# Altium PCB PCB1.PcbDoc (part 1 of 2)
Units mil, origin at the board's own origin, x right, y up, seen from the top; angles counter-clockwise.
Board outline 2495 x 1003.43 mil, 4 copper layers (Top Layer, GND, 3.3V, Bottom Layer), stack 61.581 mil thick; 64 components, 69 nets, 245 pads, 37 vias.
Unrouted connection lines stored in the file: 4.
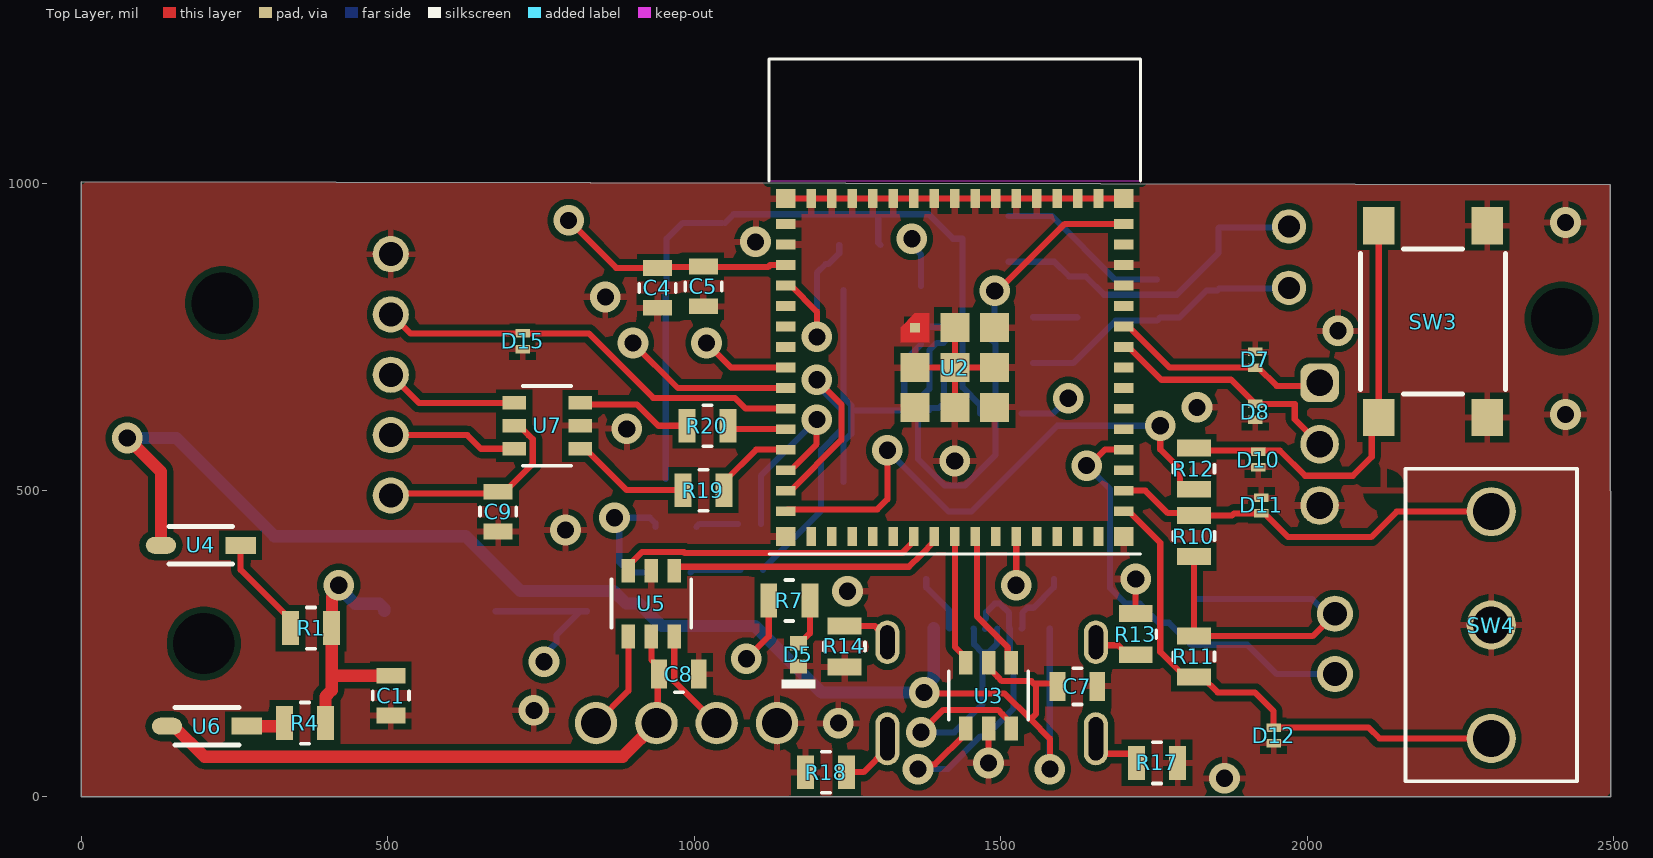
[diagram p0: Top Layer view]
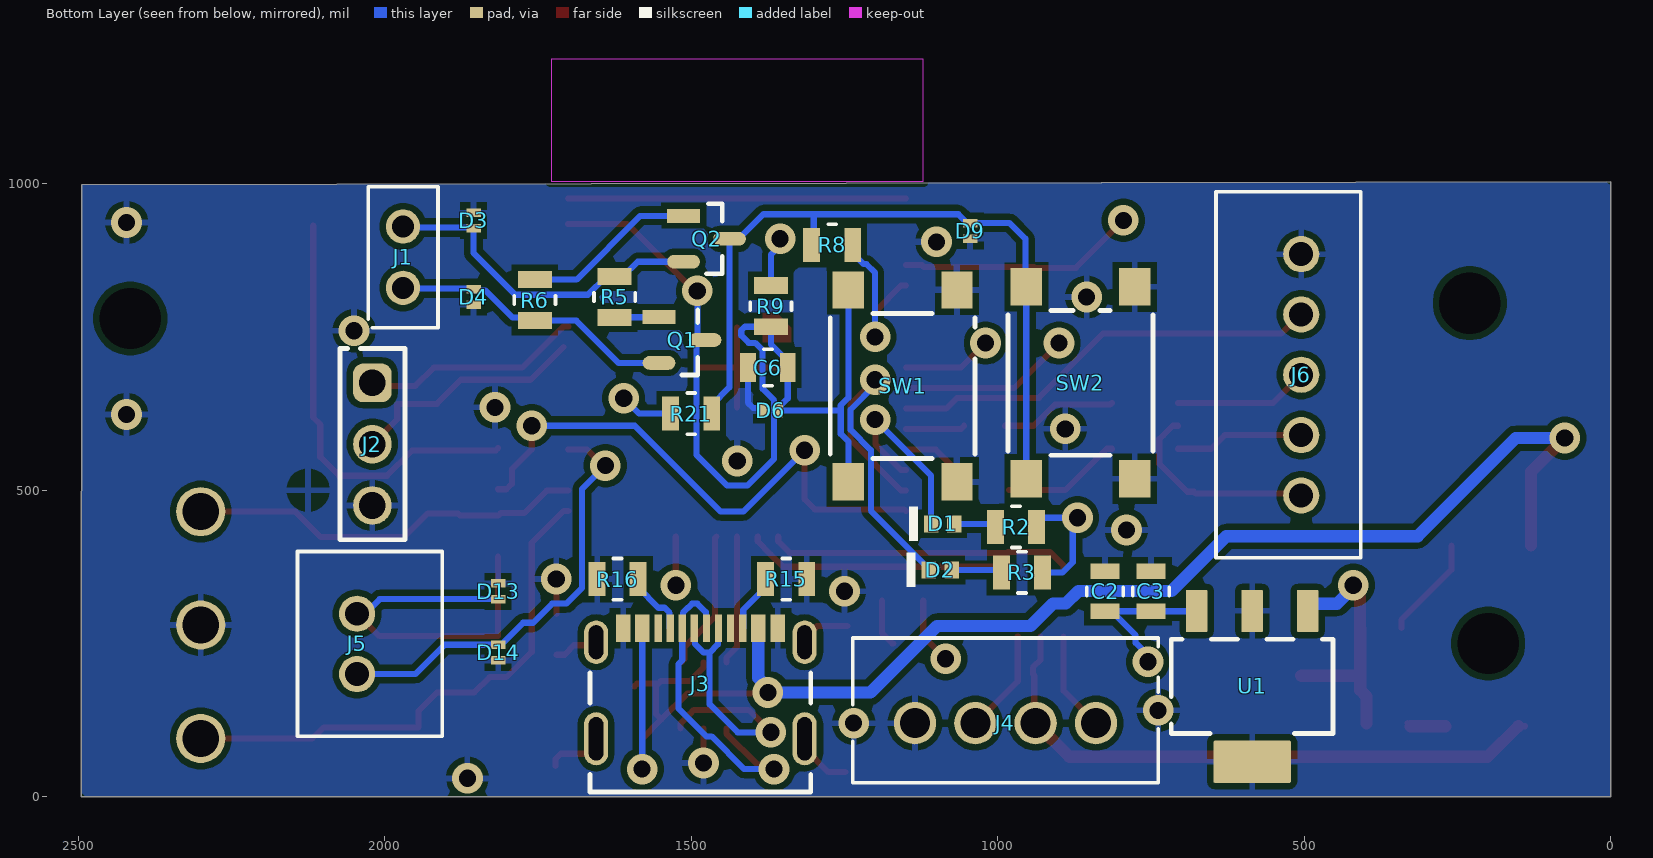
[diagram p1: Bottom Layer view, seen from below]
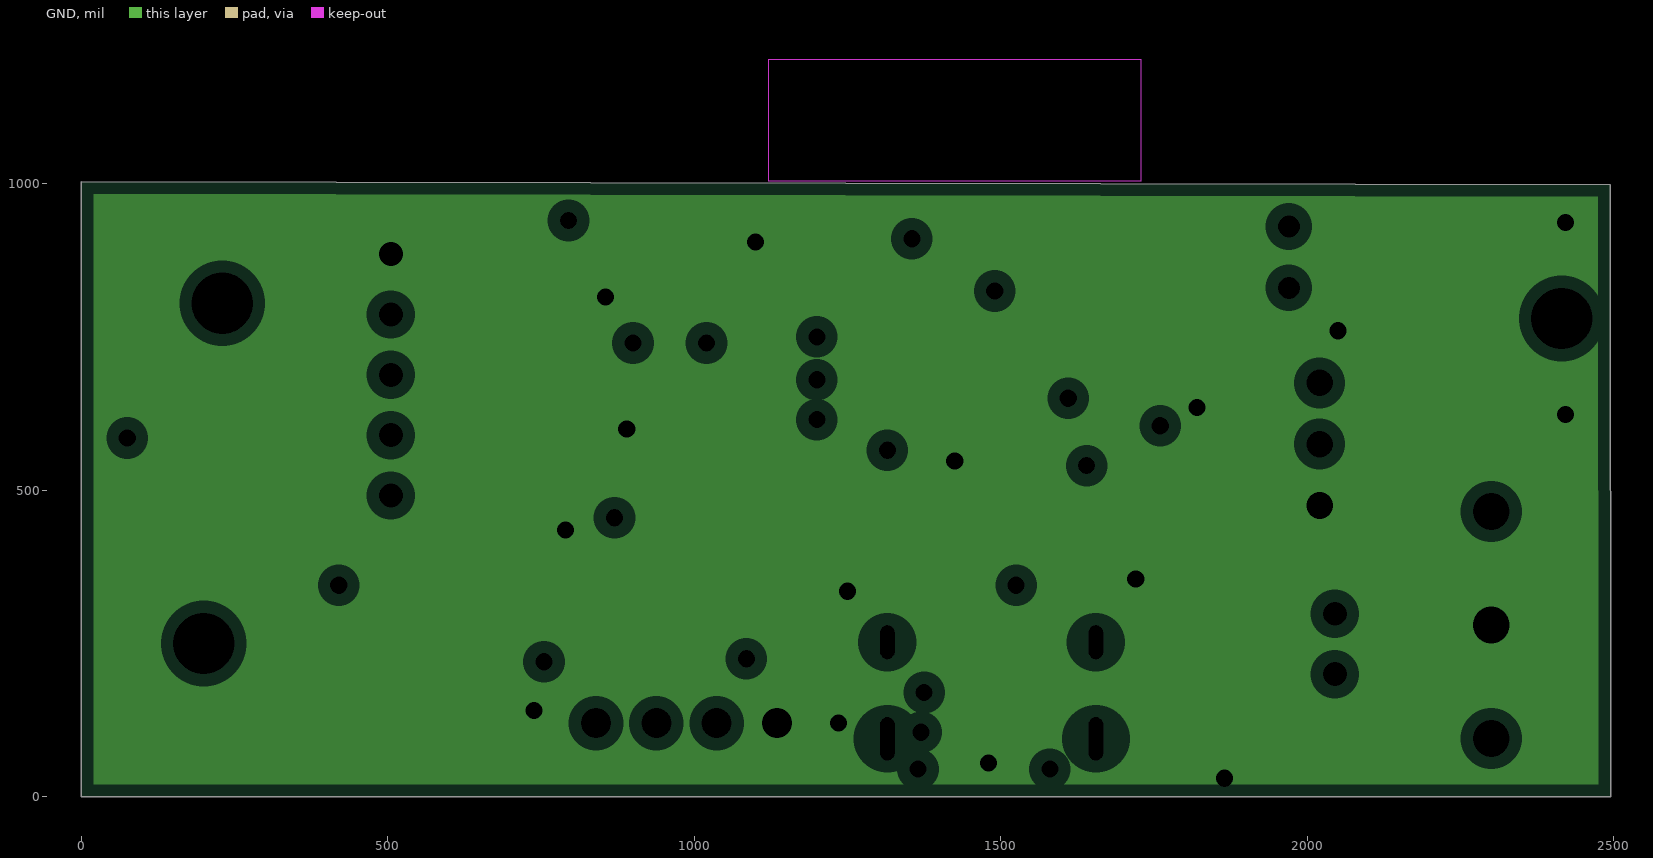
[diagram p2: GND, clearances drawn from the general rule]
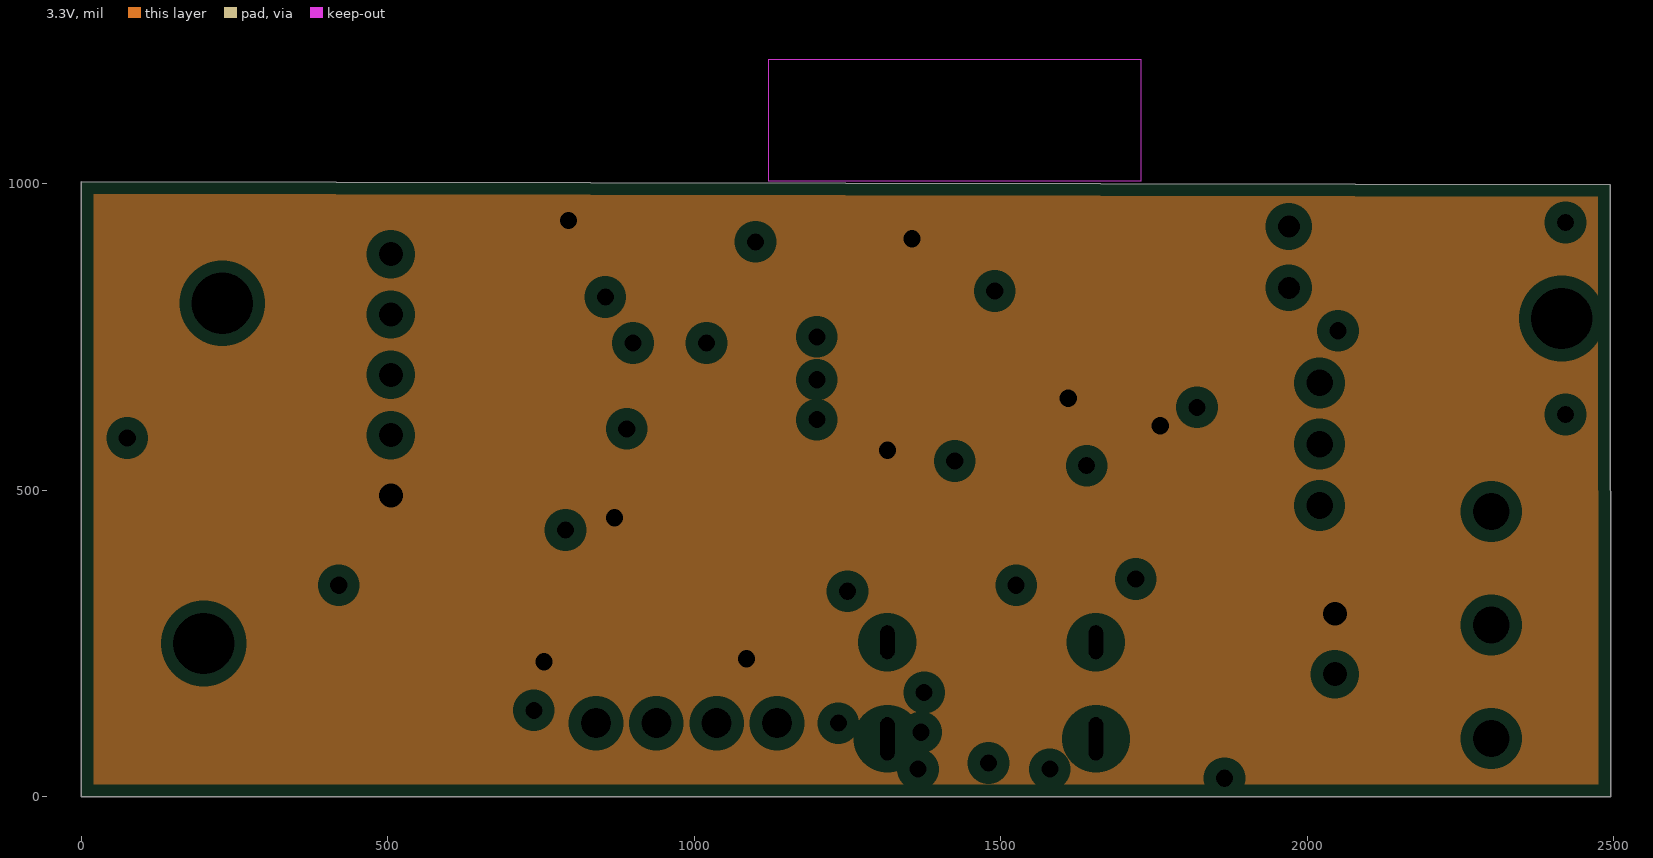
[diagram p3: 3.3V, clearances drawn from the general rule]
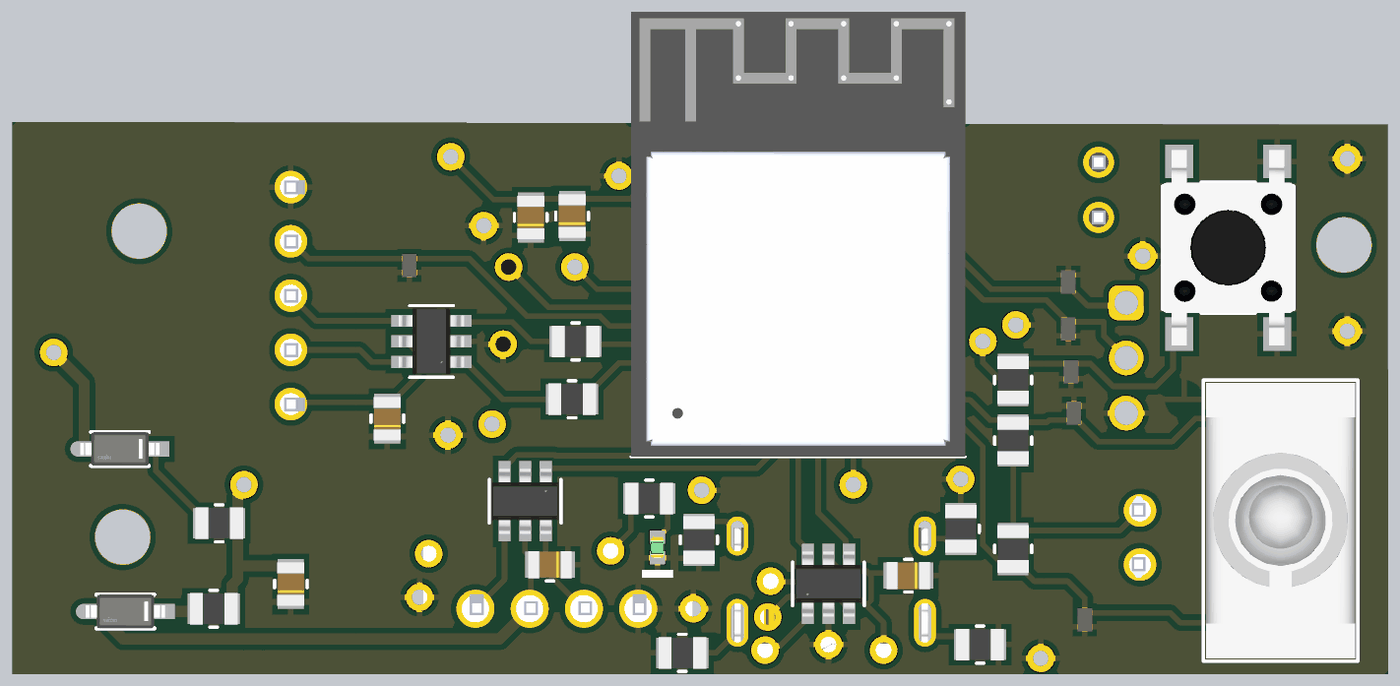
[diagram p4: 3D render of the assembled board from above, using the file's embedded part models]
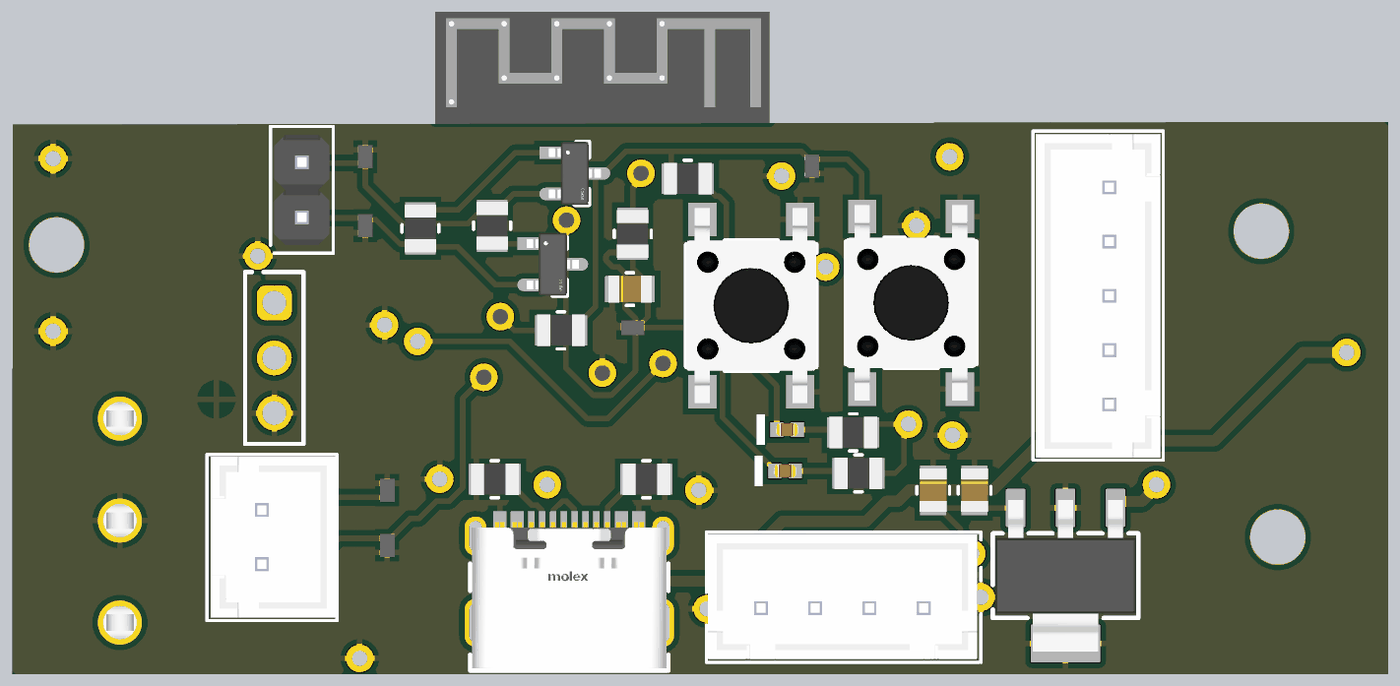
[diagram p5: 3D render of the assembled board from below, using the file's embedded part models]

## Layer stack, top to bottom
Top Solder: solder mask 0.4, Solder Resist, Dk 3.5
Top Layer: signal copper 1.378
Dielectric 2: prepreg 3.913, PP-006, Dk 4.1
GND: plane copper 0.598, net GND
Dielectric 1: dielectric 49.803, FR-4, Dk 4.8
3.3V: plane copper 0.598, net 3.3V
Dielectric 3: prepreg 3.913, PP-006, Dk 4.1
Bottom Layer: signal copper 1.378
Bottom Solder: solder mask 0.4, Solder Resist, Dk 3.5

## Board outline
0,0 0,1003.43 2494.51,998.13 2495,0

## Design rules (kind name [scope] priority, off if disabled: settings)
Clearance [All] p1: gap=10 ignorepadtopadclearanceinfootprint=FALSE except(6: Arc-Arc Arc-Track Arc-SMDPad Track-Track Track-SMDPad SMDPad-SMDPad)
PlaneClearance [All] p1: clearance=20
PlaneConnect [All] p1: planeconnectstyle=Relief reliefexpansion=20 reliefentries=4 reliefconductorwidth=10 reliefairgap=10
PolygonConnect [All] p1: connectstyle=Relief reliefconductorwidth=10 reliefentries=4 polygonreliefangle="90 Angle" airgapwidth=10
RoutingVias [All] p1: holewidth=12 width=24 viastyle="Through Hole" minholewidth=12 minwidth=24 maxholewidth=12 maxwidth=24
SolderMaskExpansion [All] p1: expansion=2 istentingtop=FALSE
SupplyNets "Schematic Supply Nets_2" [InNet('+5V_VBUS')] p1: voltage=0.000
SupplyNets "Schematic Supply Nets_1" [InNet('GND')] p2: voltage=0.000
Width [All] p1: maxlimit=100 minlimit=10 preferedwidth=10 minimp=50.000000 maximp=50.000000 favimp=50.000000
28 further rules are at their usual default settings.

## Components (designator, comment, footprint, x,y, rotation, side; value= is the part's Value field where it differs from the comment)
C1 "4.7 uF" CAP_CL21_SAM-L 505,165 r90 top value=4.7µF
C2 "10 uF" CAP_CL21_SAM-L 825,335 r270 bottom value=10µF
C3 "10 uF" CAP_CL21_SAM-L 750,335 r270 bottom value=10µF
C4 "10 uF" CAP_CL21_SAM-L 940,830 r90 top value=10µF
C5 ".1 uF" CAP_CL21_SAM-L 1015,832.48 r90 top value=100nF
C6 "1 uF" CAP_CL21_SAM-L 1375,700 r180 bottom value=1µF
C7 ".1 uF" CAP_CL21_SAM-L 1625,180 r180 top value=100nF
C8 ".1 uF" CAP_CL21_SAM-L 975,200 r180 top value=100nF
C9 ".1 uF" CAP_CL21_SAM-L 680,465 r90 top value=100nF
D1 "RED" LED0402R 1090,445 r180 bottom
D2 "RED" LED0402R 1093.7,370 r180 bottom
D3 "AQ3045-01ETG" SOD882 1855,940 r270 bottom
D4 "AQ3045-01ETG" SOD882 1855,815 r90 bottom
D5 "GREEN" LED0402G 1170,231.3 r90 top
D6 "AQ3045-01ETG" SOD882 1370,630 r180 bottom
D7 "AQ3045-01ETG" SOD882 1915,712.79 r270 top
D8 "AQ3045-01ETG" SOD882 1915,627.79 r90 top
D9 "AQ3045-01ETG" SOD882 1044.92,922.8 r90 bottom
D10 "AQ3045-01ETG" SOD882 1920,550 r90 top
D11 "AQ3045-01ETG" SOD882 1925,475 r270 top
D12 "AQ3045-01ETG" SOD882 1945,100 r90 top
D13 "AQ3045-01ETG" SOD882 1815,335 r270 bottom
D14 "AQ3045-01ETG" SOD882 1815,235 r90 bottom
D15 "AQ3045-01ETG" SOD882 720,742.8 r90 top
J1 "M20-9990246" CONN2_M20-999_1X2_HRW 1970,930 r90 bottom
J2 "61300311121" 61300311121 2020,575 r270 bottom
J3 "217179-0001" FP-2171790001-MFG 1485,139.76 r180 bottom
J4 "455-B4B-XH-A-ND" CONN_B4B-XH-A_JST 839.72,120 r180 bottom
J5 "B2B-XH-A" CONN_B2B-XH-A_JST 2045,200 r270 bottom
J6 "455-B5B-XH-A-ND" CONN_B5B-XH-A_JST 505,885 r90 bottom
Q1 "SS8050-G" FP-SS8050-G-IPC_B 1515,745 r180 bottom
Q2 "SS8050-G" FP-SS8050-G-IPC_B 1475,910 r180 bottom
R1 "0" RES_1220_SUS-L 375,275 r0 top value=0Ω
R2 "1K" RES_1220_SUS-L 970,440 r180 bottom value=1kΩ
R3 "1K" RES_1220_SUS-L 960.5,365.75 r180 bottom value=1kΩ
R4 "0" RES_1220_SUS-L 365,120 r0 top value=0Ω
R5 "10K" RES_1220_SUS-L 1625,815 r270 bottom value=10kΩ
R6 "10K" RES_1220_SUS-L 1755,810 r90 bottom value=10kΩ
R7 "1K" RES_1220_SUS-L 1155,320 r180 top value=1kΩ
R8 "0" RES_1220_SUS-L 1270,900 r180 bottom value=0Ω
R9 "10K" RES_1220_SUS-L 1370,800 r90 bottom value=10kΩ
R10 "10K" RES_1220_SUS-L 1815,425 r270 top value=10kΩ
R11 "10K" RES_1220_SUS-L 1815,228.5 r90 top value=10kΩ
R12 "27" RES_1220_SUS-L 1815,535 r270 top value=27Ω
R13 "1MR" RES_1220_SUS-L 1720,265 r90 top value=1MΩ
R14 "1MR" RES_1220_SUS-L 1245,245 r270 top value=1MΩ
R15 "5.1K" RES_1220_SUS-L 1345,355 r0 bottom value=5.1kΩ
R16 "5.1K" RES_1220_SUS-L 1620,355 r180 bottom value=5.1kΩ
R17 "1MR" RES_1220_SUS-L 1755,55 r0 top value=1MΩ
R18 "1MR" RES_1220_SUS-L 1215,40 r180 top value=1MΩ
R19 "0" RES_1220_SUS-L 1015,500 r180 top value=0Ω
R20 "0" RES_1220_SUS-L 1021.5,605 r180 top value=0Ω
R21 "10K" RES_1220_SUS-L 1500,625 r0 bottom value=10kΩ
SW1 "PTS645SH50SMTR92LFS" FP-PTS645SH50SMTR92LFS-MFG 1155,670 r90 bottom
SW2 "PTS645SH50SMTR92LFS" FP-PTS645SH50SMTR92LFS-MFG 865,675 r90 bottom
SW3 "PTS645SH50SMTR92LFS" FP-PTS645SH50SMTR92LFS-MFG 2205,775 r90 top
SW4 "100SP1T1B4M2QE" 100SP1T1_EWI 2300,94.96 r180 top
U1 "TL1963A-33DCYR" DCY0004A_N 585,180 r270 bottom
U2 "ESP32-S3-MINI-1-N8" XCVR_ESP32-S3-MINI-1-N8 1425,700 r0 top
U3 "USBLC6-2SC6" SOT23-6L_STM 1480,165 r90 top value=2.5pF
U4 "1N5819HW-7-F" FP-SOD123-IPC_B 195,410 r180 top value=50pF
U5 "USBLC6-2SC6" SOT23-6L_STM 930,315 r270 top value=2.5pF
U6 "1N5819HW-7-F" FP-SOD123-IPC_B 205,115 r180 top value=50pF
U7 "USBLC6-2SC6" SOT23-6L_STM 760,605 r180 top value=2.5pF

## Footprints (in the part's own frame and the unit in brackets; to place one, negate y for a bottom-side part, rotate by r counter-clockwise, add the part's x,y. Pads: shape width x height; smd on the part's side, far side on the other; paste and mask are expansions set on the pad)
100SP1T1_EWI [mil]
  round 80 hole 60 paste-99999 mask+0: 1(0,0) 2(0,-185.04) 3(0,-370.08)
  silkscreen extent -140,-440 140,70, body extent -135,-435 135,65, height 1168
61300311121 [mm] "Pin Header, pitch 2.54 mm, THT, Vertical, single row, 3p"
  rrect50% 1.6x1.6 hole 1.1: 1(-2.54,0)
  round 1.6 hole 1.1: 2(0,0) 3(2.54,0)
  silkscreen extent -3.96,-1.35 3.96,1.35
CAP_CL21_SAM-L [mm]
  rect 0.65x1.2 smd paste+0 mask+0: 1(-0.825,0) 2(0.825,0)
  silkscreen extent -0.17,-0.75 0.17,0.75, body extent -1,-0.63 1,0.63, height 1.35
CONN2_M20-999_1X2_HRW [mil]
  round 56 / inner round 60 / far side round 56 hole 36 paste-99999 mask+0: 1(0,0) 2(-100,0)
  silkscreen extent -165,-57 65,57, body extent -150,-50 50,50, height 223
CONN_B2B-XH-A_JST [mil]
  round 59 hole 39 paste-99999 mask+0: 1(0,0) 2(-98.43,0)
  silkscreen extent -200,-97 101,139, body extent -196,-90 96,136, height 276
CONN_B4B-XH-A_JST [mil]
  round 69 hole 49 paste-99999 mask+0: 1(0,0) 2(-98.43,0) 3(-196.85,0) 4(-295.28,0)
  silkscreen extent -397,-97 101,139, body extent -394,-91 94,135, height 276
CONN_B5B-XH-A_JST [mil]
  round 59 hole 39 paste-99999 mask+0: 1(0,0) 2(-98.43,0) 3(-196.85,0) 4(-295.28,0) 5(-393.7,0)
  silkscreen extent -495,-97 102,139, body extent -491,-92 96,134, height 276
DCY0004A_N [mm] "SOT223, 4-Leads, Body 6.7x3.7mm, Pitch 2.3mm, IPC Medium Density"
  rrect11% 1.75x0.9 smd: 1(-3.125,2.3) 2(-3.125,0) 3(-3.125,-2.3)
  rrect6% 1.75x3.2 smd: 4(3.125,0)
  silkscreen extent -1.95,-3.35 1.95,3.35, body extent -3.5,-3.25 3.5,3.25, height 1.62
FP-2171790001-MFG [mm]
  rect 0.6x1.15 smd paste+0 mask+0: A1B12(-3.2,3.425) A4B9(-2.4,3.425) B1A12(3.2,3.425) B4A9(2.4,3.425)
  rect 0.3x1.15 smd paste+0 mask+0: A5(-1.25,3.425) A6(-0.25,3.425) A7(0.25,3.425) A8(1.25,3.425) B5(1.75,3.425) B6(0.75,3.425) B7(-0.75,3.425) B8(-1.75,3.425)
  rrect100% 1x1.8 hole 1.4 slot 0.6 at 0 deg paste-2539.97 mask+0: S1(-4.32,2.85) S2(4.32,2.85)
  rrect100% 1x2.2 hole 1.8 slot 0.6 at 0 deg paste-2539.97 mask+0: S3(-4.32,-1.15) S4(4.32,-1.15)
  silkscreen extent -4.57,-3.35 4.57,1.58, body extent -4.47,-3.25 4.47,3.5, height 3.36
FP-PTS645SH50SMTR92LFS-MFG [mm]
  rect 1.55x1.3 smd paste+0 mask+0: 1(-3.975,2.25) 2(3.975,2.25) 3(-3.975,-2.25) 4(3.975,-2.25)
  silkscreen extent -3,-3 3,3, body extent -4.5,-3 4.5,3, height 4.3
FP-SOD123-IPC_B [mil]
  rect 49.51x27.66 smd paste+0 mask+0: 1(-64.98,0)
  rrect100% 49.51x27.66 smd paste+0 mask+0: 2(64.98,0)
  silkscreen extent -52,-31 52,31, body extent -100,-40 100,40, height 10
FP-SS8050-G-IPC_B [mm]
  rect 1.357x0.572 smd paste+0 mask+0: 1(-0.951,0.95)
  rrect100% 1.357x0.572 smd paste+0 mask+0: 2(-0.951,-0.95) 3(0.951,0)
  silkscreen extent 0,-1.45 0.65,1.25, body extent -1.21,-1.45 1.21,1.45, height 1.15
LED0402G [mm]
  rect 0.6x0.7 smd: 1(-0.475,0) 2(0.475,0)
  silkscreen extent -1.4,-0.71 -1.03,0.71, body extent -0.5,-0.3 0.5,0.3, height 0.21
LED0402R [mm]
  rect 0.6x0.7 smd: 1(-0.475,0) 2(0.475,0)
  silkscreen extent -1.4,-0.71 -1.03,0.71, body extent -0.5,-0.3 0.5,0.3, height 0.21
RES_1220_SUS-L [mil]
  rect 27.62x55.09 smd paste+0 mask+0: 1(-33.5,0) 2(33.5,0)
  silkscreen extent -7,-34 7,34, body extent -43,-29 43,29, height 28
SOD882 [mm]
  rect 0.35x0.6 smd: 1(-0.325,0) 2(0.325,0)
  body extent -0.54,-0.34 0.54,0.34, height 0.44
SOT23-6L_STM [mil]
  rect 38.5x22 smd paste+0 mask+0: 1(-53.75,37.4) 2(-53.75,0) 3(-53.75,-37.4) 4(53.75,-37.4) 5(53.75,0) 6(53.75,37.4)
  silkscreen extent -40,-65 40,65, body extent -59,-60 59,60, height 57
XCVR_ESP32-S3-MINI-1-N8 [mm]
  rect 0.8x0.4 smd: 1(-7,5.95) 2(-7,5.1) 3(-7,4.25) 4(-7,3.4) 5(-7,2.55) 6(-7,1.7) 7(-7,0.85) 8(-7,0) 9(-7,-0.85) 10(-7,-1.7) 11(-7,-2.55) 12(-7,-3.4) 13(-7,-4.25) 14(-7,-5.1) 15(-7,-5.95) 31(7,-5.95) 32(7,-5.1) 33(7,-4.25) 34(7,-3.4) 35(7,-2.55) 36(7,-1.7) 37(7,-0.85) 38(7,0) 39(7,0.85) 40(7,1.7) 41(7,2.55) 42(7,3.4) 43(7,4.25) 44(7,5.1) 45(7,5.95)
  rect 0.4x0.8 smd: 16(-5.95,-7) 17(-5.1,-7) 18(-4.25,-7) 19(-3.4,-7) 20(-2.55,-7) 21(-1.7,-7) 22(-0.85,-7) 23(0,-7) 24(0.85,-7) 25(1.7,-7) 26(2.55,-7) 27(3.4,-7) 28(4.25,-7) 29(5.1,-7) 30(5.95,-7) 46(5.95,7) 47(5.1,7) 48(4.25,7) 49(3.4,7) 50(2.55,7) 51(1.7,7) 52(0.85,7) 53(0,7) 54(-0.85,7) 55(-1.7,7) 56(-2.55,7) 57(-3.4,7) 58(-4.25,7) 59(-5.1,7) 60(-5.95,7)
  rect 1.2x1.2 smd: 61(0,0) 67(0,1.65) 68(1.65,1.65) 69(-1.65,0) 70(1.65,0) 71(-1.65,-1.65) 72(0,-1.65) 73(1.65,-1.65)
  rect 0.8x0.8 smd: 62(-7,7) 63(-7,-7) 64(7,-7) 65(7,7)
  rect 0.4x0.4 smd paste-1 mask+0: 66(-1.65,1.65)
  Top Layer region: -1.05,1.05 -2.25,1.05 -2.25,1.65 -1.65,2.25 -1.05,2.25
  Keep-Out Layer region: 7.7,7.725 -7.7,7.725 -7.7,12.775 7.7,12.775
  Keep-Out Layer region: 7.7,7.725 -7.7,7.725 -7.7,12.775 7.7,12.775
  silkscreen extent -7.7,-7.73 7.7,12.78, body extent -7.7,-7.73 7.7,12.78, height 2.55

## Part data
C1: library part CL21A475KAQNNNE, "25V 4.7uF X5R ±10% 0805 Multilayer Ceramic Capacitors MLCC - SMD/SMT ROHS", Case Code (Imperial)=0805, Case Code (Metric)=2012, Dielectric=X5R, Dielectric Material=Ceramic, Manufacturer="Samsung Electro-Mechanics", Max Operating Temperature=85°C, Min Operating Temperature=-55°C, Supplier Part Number=1276-1244-6-ND, Tolerance=10%, Voltage Rating=25V, Case/Package=0805, Category="Ceramic Capacitors", China RoHS=Compliant, ComponentLink1Description=https://datasheet.octopart.com:443/CL21A475KAQNNNE-Samsung-Electro-Mechanics-datasheet-136322593.pdf?src-supplier=IHS, ComponentLink1URL=https://datasheet.octopart.com:443/CL21A475KAQNNNE-Samsung-Electro-Mechanics-datasheet-136322593.pdf?src-supplier=IHS, ComponentLink2Description=https://datasheet.octopart.com:443/CL21A475KAQNNNE-Samsung-Electro-Mechanics-datasheet-11797909.pdf?src-supplier=Future+Electronics, ComponentLink2URL=https://datasheet.octopart.com:443/CL21A475KAQNNNE-Samsung-Electro-Mechanics-datasheet-11797909.pdf?src-supplier=Future+Electronics, ComponentLink3Description=https://datasheet.octopart.com:443/CL21A475KAQNNNE-Samsung-Electro-Mechanics-datasheet-110333979.pdf?src-supplier=Future+Electronics, ComponentLink3URL=https://datasheet.octopart.com:443/CL21A475KAQNNNE-Samsung-Electro-Mechanics-datasheet-110333979.pdf?src-supplier=Future+Electronics, ComponentLink4Description=https://datasheet.octopart.com:443/CL21A475KAQNNNE-Samsung-Electro-Mechanics-datasheet-81462145.pdf?src-supplier=Future+Electronics, ComponentLink4URL=https://datasheet.octopart.com:443/CL21A475KAQNNNE-Samsung-Electro-Mechanics-datasheet-81462145.pdf?src-supplier=Future+Electronics, ComponentLink5Description=https://datasheet.octopart.com:443/CL21A475KAQNNNE-Samsung-datasheet-48647566.pdf?src-supplier=Future+Electronics, ComponentLink5URL=https://datasheet.octopart.com:443/CL21A475KAQNNNE-Samsung-datasheet-48647566.pdf?src-supplier=Future+Electronics, ComponentLink6Description=https://datasheet.octopart.com:443/CL21A475KAQNNNE-Samsung-datasheet-42485236.pdf?src-supplier=Future+Electronics, ComponentLink6URL=https://datasheet.octopart.com:443/CL21A475KAQNNNE-Samsung-datasheet-42485236.pdf?src-supplier=Future+Electronics, ComponentLink7Description=https://datasheet.octopart.com:443/CL21A475KAQNNNE-Samsung-Electro-Mechanics-datasheet-149154248.pdf?src-supplier=Future+Electronics, ComponentLink7URL=https://datasheet.octopart.com:443/CL21A475KAQNNNE-Samsung-Electro-Mechanics-datasheet-149154248.pdf?src-supplier=Future+Electronics, ComponentLink8Description=https://datasheet.octopart.com/CL21A475KAQNNNE-Samsung-Electro-Mechanics-datasheet-97040617.pdf, ComponentLink8URL=https://datasheet.octopart.com/CL21A475KAQNNNE-Samsung-Electro-Mechanics-datasheet-97040617.pdf, ComponentLink9Description=https://datasheet.octopart.com/CL21A475KAQNNNE-Samsung-Electro-Mechanics-datasheet-8324245.pdf, ComponentLink9URL=https://datasheet.octopart.com/CL21A475KAQNNNE-Samsung-Electro-Mechanics-datasheet-8324245.pdf, ComponentLink10Description=https://datasheet.octopart.com/General-Multilayer-Ceramic-Capacitors-Samsung-datasheet-family-111.pdf, ComponentLink10URL=https://datasheet.octopart.com/General-Multilayer-Ceramic-Capacitors-Samsung-datasheet-family-111.pdf, ComponentLink11Description=https://datasheet.octopart.com:443/CL21A475KAQNNNE-Samsung-datasheet-59220082.pdf?src-supplier=TME, ComponentLink11URL=https://datasheet.octopart.com:443/CL21A475KAQNNNE-Samsung-datasheet-59220082.pdf?src-supplier=TME, ComponentLink12Description=http://sigma.octopart.com:80/rohs_certificate/General-Multilayer-Ceramic-Capacitors-Samsung-family-110.pdf?src-supplier=Compliance+Statements, ComponentLink12URL=http://sigma.octopart.com:80/rohs_certificate/General-Multilayer-Ceramic-Capacitors-Samsung-family-110.pdf?src-supplier=Compliance+Statements, ComponentLink13Description=http://sigma.octopart.com:80/rohs_statement/General-Multilayer-Ceramic-Capacitors-Samsung-family-132.pdf?src-supplier=Compliance+Statements, ComponentLink13URL=http://sigma.octopart.com:80/rohs_statement/General-Multilayer-Ceramic-Capacitors-Samsung-family-132.pdf?src-supplier=Compliance+Statements, ComponentLink14Description=http://sigma.octopart.com:80/reach_statement/General-Multilayer-Ceramic-Capacitors-Samsung-family-133.pdf?src-supplier=Compliance+Statements, ComponentLink14URL=http://sigma.octopart.com:80/reach_statement/General-Multilayer-Ceramic-Capacitors-Samsung-family-133.pdf?src-supplier=Compliance+Statements, Country of Origin="Mainland China, Philippines, South Korea", Depth=1.25mm, Export Control Classification Number (ECCN) Code=EAR99, Harmonized Tariff Schedule (HTS) Code=8532.24.00.20, Height=1.4mm, Introduction Date=2009-10-29, Lead Free="Lead Free", Length=2mm, Lifecycle Status=Production, Manufacturer Part Number=CL21A475KAQNNNE, Material=Ceramic, Mounting Technology="Surface Mount", Number of Terminals=2, Packaging="Tape & Reel", Pricing="1=0.1, 10=0.057, 50=0.039, 100=0.0337, 500=0.02474, 1000=0.02199 (USD)", Radiation Hardening=No, REACH SVHC=Yes, RoHS=Compliant, Schedule B="8532240020, 8532240020|8532240020|8532240020|8532240020|8532240020|8532240020|8532240020|8532240020|8532240020|8532240020|8532240020|8532240020|8532240020, 8532240020|8532240020|8532240020|8532240020|8532240020|8532240020|8532240020|8532240020|8532240020|8532240020|8532240020|8532240020|8532240020|8532240020, 8532240020|8532240020|8532240020|8532240020|8532240020|8532240020|8532240020|8532240020|8532240020|8532240020|8532240020|8532240020|8532240020|8532240020|8532240020", Stock=1914384, Supplier=DigiKey, Thickness=1.397mm, Voltage Rating (DC)=25V, Width=1.25mm
C2 C3 C4: library part CL21B106KOQNNNE, "16V 10uF X7R ±10% 0805 Multilayer Ceramic Capacitors MLCC - SMD/SMT ROHS", Case Code (Imperial)=0805, Case Code (Metric)=2012, Dielectric=X7R, Dielectric Material=Ceramic, Manufacturer="Samsung Electro-Mechanics", Max Operating Temperature=125°C, Min Operating Temperature=-55°C, Supplier Part Number=1276-2872-6-ND, Tolerance=10%, Voltage=16V, Case/Package=0805, Category="Ceramic Capacitors", China RoHS=Compliant, ComponentLink1Description=https://datasheet.octopart.com:443/CL21B106KOQNNNE-Samsung-Electro-Mechanics-datasheet-136482503.pdf?src-supplier=IHS, ComponentLink1URL=https://datasheet.octopart.com:443/CL21B106KOQNNNE-Samsung-Electro-Mechanics-datasheet-136482503.pdf?src-supplier=IHS, ComponentLink2Description=https://datasheet.octopart.com:443/CL21B106KOQNNNE-Samsung-Electro-Mechanics-datasheet-116891046.pdf?src-supplier=Future+Electronics, ComponentLink2URL=https://datasheet.octopart.com:443/CL21B106KOQNNNE-Samsung-Electro-Mechanics-datasheet-116891046.pdf?src-supplier=Future+Electronics, ComponentLink3Description=https://datasheet.octopart.com:443/CL21B106KOQNNNE-Samsung-Electro-Mechanics-datasheet-81462191.pdf?src-supplier=Future+Electronics, ComponentLink3URL=https://datasheet.octopart.com:443/CL21B106KOQNNNE-Samsung-Electro-Mechanics-datasheet-81462191.pdf?src-supplier=Future+Electronics, ComponentLink4Description=https://datasheet.octopart.com:443/CL21B106KOQNNNE-Samsung-datasheet-12530662.pdf?src-supplier=Future+Electronics, ComponentLink4URL=https://datasheet.octopart.com:443/CL21B106KOQNNNE-Samsung-datasheet-12530662.pdf?src-supplier=Future+Electronics, ComponentLink5Description=https://datasheet.octopart.com:443/CL21B106KOQNNNE-Samsung-datasheet-26669285.pdf?src-supplier=Future+Electronics, ComponentLink5URL=https://datasheet.octopart.com:443/CL21B106KOQNNNE-Samsung-datasheet-26669285.pdf?src-supplier=Future+Electronics, ComponentLink6Description=https://datasheet.octopart.com:443/CL21B106KOQNNNE-Samsung-Electro-Mechanics-datasheet-149045986.pdf?src-supplier=Future+Electronics, ComponentLink6URL=https://datasheet.octopart.com:443/CL21B106KOQNNNE-Samsung-Electro-Mechanics-datasheet-149045986.pdf?src-supplier=Future+Electronics, ComponentLink7Description=https://datasheet.octopart.com/CL21B106KOQNNNE-Samsung-Electro-Mechanics-datasheet-97040617.pdf, ComponentLink7URL=https://datasheet.octopart.com/CL21B106KOQNNNE-Samsung-Electro-Mechanics-datasheet-97040617.pdf, ComponentLink8Description=https://datasheet.octopart.com/CL21B106KOQNNNE-Samsung-Electro-Mechanics-datasheet-8324245.pdf, ComponentLink8URL=https://datasheet.octopart.com/CL21B106KOQNNNE-Samsung-Electro-Mechanics-datasheet-8324245.pdf, ComponentLink9Description=https://datasheet.octopart.com:443/CL21B106KOQNNNE-Samsung-Electro-Mechanics-datasheet-11806859.pdf?src-supplier=Arrow+Electronics, ComponentLink9URL=https://datasheet.octopart.com:443/CL21B106KOQNNNE-Samsung-Electro-Mechanics-datasheet-11806859.pdf?src-supplier=Arrow+Electronics, ComponentLink10Description=https://datasheet.octopart.com:443/CL21B106KOQNNNE-Samsung-datasheet-8326407.pdf?src-supplier=TME, ComponentLink10URL=https://datasheet.octopart.com:443/CL21B106KOQNNNE-Samsung-datasheet-8326407.pdf?src-supplier=TME, Contact Plating=Tin, Country of Origin="Mainland China, Philippines, South Korea", Depth=1.25mm, Export Control Classification Number (ECCN) Code=EAR99, Harmonized Tariff Schedule (HTS) Code=8532.24.00.20, Height=1.4mm, Introduction Date=2010-04-09, Length=2mm, Lifecycle Status=Production, Manufacturer Part Number=CL21B106KOQNNNE, Material=Ceramic, Mounting Technology="Surface Mount", Number of Terminals=2, Pricing="1=0.08, 10=0.035 (USD)", Radiation Hardening=No, REACH SVHC=Yes, RoHS=Compliant, Schedule B="8532240020, 8532240020|8532240020, 8532240020|8532240020|8532240020, 8532240020|8532240020|8532240020|8532240020", Stock=2199280, Supplier=DigiKey, Thickness=1.397mm, Voltage Rating=16V, Voltage Rating (DC)=16V, Width=1.25mm
C5 C7 C8 C9: library part CL21B104KBCNNNC, "50V 100nF X7R ±10% 0805 Multilayer Ceramic Capacitors MLCC - SMD/SMT ROHS", Case Code (Imperial)=0805, Case Code (Metric)=2012, Dielectric=X7R, Dielectric Material=Ceramic, Manufacturer="Samsung Electro-Mechanics", Max Operating Temperature=125°C, Min Operating Temperature=-55°C, Supplier Part Number=1276-1003-6-ND, Tolerance=10%, Voltage=50V, Case/Package=0805, Category="Ceramic Capacitors", China RoHS=Compliant, ComponentLink1Description=https://datasheet.octopart.com:443/CL21B104KBCNNNC-Samsung-Electro-Mechanics-datasheet-137745078.pdf?src-supplier=IHS, ComponentLink1URL=https://datasheet.octopart.com:443/CL21B104KBCNNNC-Samsung-Electro-Mechanics-datasheet-137745078.pdf?src-supplier=IHS, ComponentLink2Description=https://datasheet.octopart.com/CL21B104KBCNNNC-Samsung-Electro-Mechanics-datasheet-8324245.pdf, ComponentLink2URL=https://datasheet.octopart.com/CL21B104KBCNNNC-Samsung-Electro-Mechanics-datasheet-8324245.pdf, ComponentLink3Description=https://datasheet.octopart.com/CL21B104KBCNNNC-Samsung-Electro-Mechanics-datasheet-97040617.pdf, ComponentLink3URL=https://datasheet.octopart.com/CL21B104KBCNNNC-Samsung-Electro-Mechanics-datasheet-97040617.pdf, ComponentLink4Description=https://datasheet.octopart.com:443/CL21B104KBCNNNC-Samsung-Electro-Mechanics-datasheet-11548950.pdf?src-supplier=Future+Electronics, ComponentLink4URL=https://datasheet.octopart.com:443/CL21B104KBCNNNC-Samsung-Electro-Mechanics-datasheet-11548950.pdf?src-supplier=Future+Electronics, ComponentLink5Description=https://datasheet.octopart.com:443/CL21B104KBCNNNC-Samsung-Electro-Mechanics-datasheet-116891032.pdf?src-supplier=Future+Electronics, ComponentLink5URL=https://datasheet.octopart.com:443/CL21B104KBCNNNC-Samsung-Electro-Mechanics-datasheet-116891032.pdf?src-supplier=Future+Electronics, ComponentLink6Description=https://datasheet.octopart.com:443/CL21B104KBCNNNC-Samsung-Electro-Mechanics-datasheet-81462175.pdf?src-supplier=Future+Electronics, ComponentLink6URL=https://datasheet.octopart.com:443/CL21B104KBCNNNC-Samsung-Electro-Mechanics-datasheet-81462175.pdf?src-supplier=Future+Electronics, ComponentLink7Description=https://datasheet.octopart.com:443/CL21B104KBCNNNC-Samsung-datasheet-42485244.pdf?src-supplier=Future+Electronics, ComponentLink7URL=https://datasheet.octopart.com:443/CL21B104KBCNNNC-Samsung-datasheet-42485244.pdf?src-supplier=Future+Electronics, ComponentLink8Description=https://datasheet.octopart.com:443/CL21B104KBCNNNC-Samsung-Electro-Mechanics-datasheet-149045937.pdf?src-supplier=Future+Electronics, ComponentLink8URL=https://datasheet.octopart.com:443/CL21B104KBCNNNC-Samsung-Electro-Mechanics-datasheet-149045937.pdf?src-supplier=Future+Electronics, ComponentLink9Description=https://datasheet.octopart.com:443/CL21B104KBCNNNC-Samsung-datasheet-8326407.pdf?src-supplier=TME, ComponentLink9URL=https://datasheet.octopart.com:443/CL21B104KBCNNNC-Samsung-datasheet-8326407.pdf?src-supplier=TME, Contact Plating=Tin, Country of Origin="Mainland China, Philippines, South Korea", Depth=1.25mm, Export Control Classification Number (ECCN) Code=EAR99, Harmonized Tariff Schedule (HTS) Code=8532.24.00.20, Height=950µm, Introduction Date=2009-07-27, Lead Free="Lead Free", Length=2mm, Lifecycle Status=Production, Manufacturer Part Number=CL21B104KBCNNNC, Material=Ceramic, Mounting Technology="Surface Mount", Number of Terminals=2, Pricing="1=0.08, 10=0.006 (USD)", Radiation Hardening=No, REACH SVHC=Yes, RoHS=Compliant, Schedule B="8532240020, 8532240020|8532240020, 8532240020|8532240020|8532240020, 8532240020|8532240020|8532240020|8532240020", Stock=2859375, Supplier=DigiKey, Thickness=939.8µm, Voltage Rating=50V, Voltage Rating (DC)=50V, Width=1.25mm
C6: library part CL21B105KBFNNNE, "50V 1uF X7R ±10% 0805 Multilayer Ceramic Capacitors MLCC - SMD/SMT ROHS", Case Code (Imperial)=0805, Case Code (Metric)=2012, Dielectric=X7R, Dielectric Material=Ceramic, Manufacturer="Samsung Electro-Mechanics", Max Operating Temperature=125°C, Min Operating Temperature=-55°C, Supplier Part Number=1276-1029-6-ND, Tolerance=10%, Voltage=50V, Case/Package=0805, Category="Ceramic Capacitors", China RoHS=Compliant, ComponentLink1Description=https://datasheet.octopart.com:443/CL21B105KBFNNNE-Samsung-Electro-Mechanics-datasheet-136482495.pdf?src-supplier=IHS, ComponentLink1URL=https://datasheet.octopart.com:443/CL21B105KBFNNNE-Samsung-Electro-Mechanics-datasheet-136482495.pdf?src-supplier=IHS, ComponentLink2Description=https://datasheet.octopart.com:443/CL21B105KBFNNNE-Samsung-Electro-Mechanics-datasheet-11733377.pdf?src-supplier=Future+Electronics, ComponentLink2URL=https://datasheet.octopart.com:443/CL21B105KBFNNNE-Samsung-Electro-Mechanics-datasheet-11733377.pdf?src-supplier=Future+Electronics, ComponentLink3Description=https://datasheet.octopart.com:443/CL21B105KBFNNNE-Samsung-Electro-Mechanics-datasheet-116891038.pdf?src-supplier=Future+Electronics, ComponentLink3URL=https://datasheet.octopart.com:443/CL21B105KBFNNNE-Samsung-Electro-Mechanics-datasheet-116891038.pdf?src-supplier=Future+Electronics, ComponentLink4Description=https://datasheet.octopart.com:443/CL21B105KBFNNNE-Samsung-Electro-Mechanics-datasheet-81462183.pdf?src-supplier=Future+Electronics, ComponentLink4URL=https://datasheet.octopart.com:443/CL21B105KBFNNNE-Samsung-Electro-Mechanics-datasheet-81462183.pdf?src-supplier=Future+Electronics, ComponentLink5Description=https://datasheet.octopart.com:443/CL21B105KBFNNNE-Samsung-datasheet-48647582.pdf?src-supplier=Future+Electronics, ComponentLink5URL=https://datasheet.octopart.com:443/CL21B105KBFNNNE-Samsung-datasheet-48647582.pdf?src-supplier=Future+Electronics, ComponentLink6Description=https://datasheet.octopart.com:443/CL21B105KBFNNNE-Samsung-datasheet-8326294.pdf?src-supplier=Future+Electronics, ComponentLink6URL=https://datasheet.octopart.com:443/CL21B105KBFNNNE-Samsung-datasheet-8326294.pdf?src-supplier=Future+Electronics, ComponentLink7Description=https://datasheet.octopart.com:443/CL21B105KBFNNNE-Samsung-Electro-Mechanics-datasheet-149045959.pdf?src-supplier=Future+Electronics, ComponentLink7URL=https://datasheet.octopart.com:443/CL21B105KBFNNNE-Samsung-Electro-Mechanics-datasheet-149045959.pdf?src-supplier=Future+Electronics, ComponentLink8Description=https://datasheet.octopart.com/CL21B105KBFNNNE-Samsung-Electro-Mechanics-datasheet-97040617.pdf, ComponentLink8URL=https://datasheet.octopart.com/CL21B105KBFNNNE-Samsung-Electro-Mechanics-datasheet-97040617.pdf, ComponentLink9Description=https://datasheet.octopart.com/CL21B105KBFNNNE-Samsung-Electro-Mechanics-datasheet-8324245.pdf, ComponentLink9URL=https://datasheet.octopart.com/CL21B105KBFNNNE-Samsung-Electro-Mechanics-datasheet-8324245.pdf, ComponentLink10Description=https://datasheet.octopart.com/General-Multilayer-Ceramic-Capacitors-Samsung-datasheet-family-111.pdf, ComponentLink10URL=https://datasheet.octopart.com/General-Multilayer-Ceramic-Capacitors-Samsung-datasheet-family-111.pdf, ComponentLink11Description=https://datasheet.octopart.com:443/CL21B105KBFNNNE-Samsung-datasheet-59220082.pdf?src-supplier=TME, ComponentLink11URL=https://datasheet.octopart.com:443/CL21B105KBFNNNE-Samsung-datasheet-59220082.pdf?src-supplier=TME, ComponentLink12Description=http://sigma.octopart.com:80/rohs_certificate/General-Multilayer-Ceramic-Capacitors-Samsung-family-110.pdf?src-supplier=Compliance+Statements, ComponentLink12URL=http://sigma.octopart.com:80/rohs_certificate/General-Multilayer-Ceramic-Capacitors-Samsung-family-110.pdf?src-supplier=Compliance+Statements, ComponentLink13Description=http://sigma.octopart.com:80/rohs_statement/General-Multilayer-Ceramic-Capacitors-Samsung-family-132.pdf?src-supplier=Compliance+Statements, ComponentLink13URL=http://sigma.octopart.com:80/rohs_statement/General-Multilayer-Ceramic-Capacitors-Samsung-family-132.pdf?src-supplier=Compliance+Statements, ComponentLink14Description=http://sigma.octopart.com:80/reach_statement/General-Multilayer-Ceramic-Capacitors-Samsung-family-133.pdf?src-supplier=Compliance+Statements, ComponentLink14URL=http://sigma.octopart.com:80/reach_statement/General-Multilayer-Ceramic-Capacitors-Samsung-family-133.pdf?src-supplier=Compliance+Statements, Country of Origin="Mainland China, Philippines, South Korea", Depth=1.25mm, Export Control Classification Number (ECCN) Code=EAR99, Harmonized Tariff Schedule (HTS) Code=8532.24.00.20, Height=1.35mm, Introduction Date=2010-07-30, Length=2mm, Lifecycle Status=Production, Manufacturer Part Number=CL21B105KBFNNNE, Material=Ceramic, Mounting Technology="Surface Mount", Number of Terminals=2, Pricing="1=0.08, 10=0.013 (USD)", Radiation Hardening=No, REACH SVHC=Yes, RoHS=Compliant, Schedule B="8532240020, 8532240020|8532240020, 8532240020|8532240020|8532240020, 8532240020|8532240020|8532240020|8532240020", Stock=1740686, Supplier=DigiKey, Thickness=1.3462mm, Voltage Rating=50V, Voltage Rating (DC)=50V, Width=1.25mm
D1 D2: library part VLMS1500-GS08, "LED RED 0402 SMD", Color=Red, Forward Current=30mA, Forward Voltage=2.4V, LCSC Part Number=C511370, Manufacturer=Vishay, Max Operating Temperature=85°C, Min Operating Temperature=-30°C, Reverse Voltage-Max=5V, Supplier Part Number=VLMS1500-GS08CT-ND, Category=LEDs, Channels=1, Color@wavelength=Red, ComponentLink1Description=https://datasheet.ciiva.com:443/pdfs/VipMasterIC/IC/VISH/VISH-S-A0003457490/VISH-S-A0003457490-1.pdf?src-supplier=IHS+Markit, ComponentLink1URL=https://datasheet.ciiva.com:443/pdfs/VipMasterIC/IC/VISH/VISH-S-A0003457490/VISH-S-A0003457490-1.pdf?src-supplier=IHS+Markit, ComponentLink2Description=http://www.farnell.com/datasheets/1809983.pdf?src-supplier=Farnell, ComponentLink2URL=http://www.farnell.com/datasheets/1809983.pdf?src-supplier=Farnell, ComponentLink3Description=http://www.mouser.com/ds/2/427/vlmo1500-244705.pdf?src-supplier=Mouser, ComponentLink3URL=http://www.mouser.com/ds/2/427/vlmo1500-244705.pdf?src-supplier=Mouser, ComponentLink4Description=https://datasheet.octopart.com/VLMS1500-GS08-Vishay-datasheet-62332426.pdf?src-supplier=Newark, ComponentLink4URL=https://datasheet.octopart.com/VLMS1500-GS08-Vishay-datasheet-62332426.pdf?src-supplier=Newark, ComponentLink5Description=https://datasheet.octopart.com/VLMS1500-GS08-Vishay-datasheet-33014519.pdf?src-supplier=Element14, ComponentLink5URL=https://datasheet.octopart.com/VLMS1500-GS08-Vishay-datasheet-33014519.pdf?src-supplier=Element14, ComponentLink6Description=http://datasheet.octopart.com/VLMS1500-GS08-Vishay-datasheet-21227148.pdf?src-supplier=Avnet, ComponentLink6URL=http://datasheet.octopart.com/VLMS1500-GS08-Vishay-datasheet-21227148.pdf?src-supplier=Avnet, ComponentLink7Description=http://www.farnell.com/datasheets/1809983.pdf?src-supplier=Newark, ComponentLink7URL=http://www.farnell.com/datasheets/1809983.pdf?src-supplier=Newark, ComponentLink8Description=http://www.farnell.com/datasheets/2050839.pdf?src-supplier=Newark, ComponentLink8URL=http://www.farnell.com/datasheets/2050839.pdf?src-supplier=Newark, ComponentLink9Description=http://datasheet.octopart.com/VLMS1500-GS08-Vishay-datasheet-21227148.pdf?src-supplier=Quest, ComponentLink9URL=http://datasheet.octopart.com/VLMS1500-GS08-Vishay-datasheet-21227148.pdf?src-supplier=Quest, ComponentLink10Description=http://datasheet.octopart.com/VLMS1500-GS08-Vishay-datasheet-21227148.pdf?src-supplier=NAC+Semi, ComponentLink10URL=http://datasheet.octopart.com/VLMS1500-GS08-Vishay-datasheet-21227148.pdf?src-supplier=NAC+Semi, Luminous Intensity-Nom=54mcd, Manufacturer Part Number=VLMS1500-GS08, Mounting Technology="Surface Mount", Optoelectronic Device Type="SINGLE COLOR LED", Overall Height=0.35mm, Packaging="Tape and Reel", Pins=2, Pricing="1=0.34, 10=0.265, 100=0.119, 500=0.10746, 1000=0.08827 (USD)", Reach SVHC Compliant=Yes, RoHS=Yes, RoHS Compliant=Yes, Shape=Rectangular, Size=0.5mm, Stock=70376, Supplier=Digikey, Terminal Pitch=0.95mm, Viewing Angle=130°
D3 D4 D6 D7 D8 D9 D10 D11 D12 D13 D14 D15: "TVS DIODE 5.3VWM 12VC SOD882", LCSC Part Number=C3710326, Manufacturer=Littelfuse, Max Breakdown Voltage=9V, Max Operating Temperature=150°C, Min Breakdown Voltage=6.8V, Min Operating Temperature=-55°C, Non-rep Peak Rev Power Dis-Max=40W, Package Body Material=Plastic, Package Shape=Rectangular, Package Style="CHIP CARRIERMeter", Rep Pk Reverse Voltage-Max=5.3V, Supplier Part Number=F9321CT-ND, Category="TVS Diodes", ComponentLink1Description=https://datasheet.ciiva.com:443/pdfs/VipMasterIC/IC/LFSI/LFSI-S-A0007892042/LFSI-S-A0007892042-1.pdf?src-supplier=IHS+Markit, ComponentLink1URL=https://datasheet.ciiva.com:443/pdfs/VipMasterIC/IC/LFSI/LFSI-S-A0007892042/LFSI-S-A0007892042-1.pdf?src-supplier=IHS+Markit, ComponentLink2Description=https://www.littelfuse.com/~/media/electronics/datasheets/tvs_diode_arrays/littelfuse_tvs_diode_array_aq3045_datasheet.pdf.pdf?src-supplier=Digikey, ComponentLink2URL=https://www.littelfuse.com/~/media/electronics/datasheets/tvs_diode_arrays/littelfuse_tvs_diode_array_aq3045_datasheet.pdf.pdf?src-supplier=Digikey, ComponentLink3Description=http://www.littelfuse.com/~/media/electronics/datasheets/tvs_diode_arrays/littelfuse_tvs_diode_array_aq3045_datasheet.pdf.pdf?src-supplier=Digikey, ComponentLink3URL=http://www.littelfuse.com/~/media/electronics/datasheets/tvs_diode_arrays/littelfuse_tvs_diode_array_aq3045_datasheet.pdf.pdf?src-supplier=Digikey, Diode Element Material=SILICON, Diode Type="TRANS VOLTAGE SUPPRESSOR", Manufacturer Part Number=AQ3045-01ETG, Number of Elements=1, Pins=2, Polarity=Bidirectional, Pricing="1=0.5, 10=0.391, 100=0.2344, 500=0.217, 1000=0.14756, 2000=0.13585, 5000=0.1302 (USD)", Reach SVHC Compliant=Yes, Reference Standard=AEC-Q101, RoHS=Yes, RoHS Compliant=Yes, Stock=21664, Supplier=Digikey, Surface Mount=Yes, Technology=AVALANCHE, Terminal Form="No Lead", Terminal Position=BOTTOM
D5: library part VLMG1500-GS08, "LED YLW-GRN 0402 SMD", Case Code (Imperial)=0402, Case Code (Metric)=1005, Color=Green,Yellow, Forward Current=30mA, Forward Voltage=2V, Illumination Color=Green, LCSC Part Number=C511404, Lens Color=Clear, Manufacturer=Vishay, Max Operating Temperature=85°C, Min Operating Temperature=-30°C, Package Quantity=1, Power Dissipation=75mW, Reverse Voltage=5V, Supplier Part Number=VLMG1500-GS08CT-ND, Test Current=20mA, Case/Package=0402, Category=LEDs, ComponentLink1Description=https://datasheet.ciiva.com/12071/vlmo1500-244705-12071911.pdf?src-supplier=Mouser, ComponentLink1URL=https://datasheet.ciiva.com/12071/vlmo1500-244705-12071911.pdf?src-supplier=Mouser, ComponentLink2Description=https://datasheet.ciiva.com/30005/vlmo1500-30005134.pdf?src-supplier=Avnet, ComponentLink2URL=https://datasheet.ciiva.com/30005/vlmo1500-30005134.pdf?src-supplier=Avnet, Depth=0.5mm, Dominant Wavelength=571nm, Height=0.35mm, Lead Free="Lead Free", Length=1mm, Lens Style=Rectangular, Luminous Intensity=35mcd, Manufacturer Part Number=VLMG1500-GS08, Mounting Technology="Surface Mount", Number of Elements=1, Number of LEDs=1, Packaging="Tape and Reel", Pins=2, Power Rating=75mW, Pricing="1=0.34, 10=0.265, 100=0.119, 500=0.10746, 1000=0.08827 (USD)", Radiation Hardening=No, Reach SVHC Compliant=Unknown, RoHS=Yes, RoHS Compliant=Yes, Series=CHipLED, Stock=98, Supplier=Digikey, Viewing Angle=130°, Wavelength=571nm, Width=0.5mm
J1: "Connector Header Through Hole 2 position 0.100\" (2.54mm)", Case/Package=SIL, Color=Black, Contact Resistance=30mΩ, Current Rating=3A, Dielectric Material=Polyamide, Insulation Resistance=1GΩ, Manufacturer=Harwin, Max Operating Temperature=105°C, Min Operating Temperature=-40°C, Supplier Part Number=952-2262-ND, Voltage Rating (AC)=750V, Category="Headers and Wire Housings", ComponentLink1Description=https://datasheet.octopart.com:443/M20-9990246-Harwin-datasheet-169407857.pdf?src-supplier=Newark, ComponentLink1URL=https://datasheet.octopart.com:443/M20-9990246-Harwin-datasheet-169407857.pdf?src-supplier=Newark, ComponentLink2Description=https://datasheet.octopart.com:443/M20-9990246-Harwin-datasheet-27378916.pdf?src-supplier=Newark, ComponentLink2URL=https://datasheet.octopart.com:443/M20-9990246-Harwin-datasheet-27378916.pdf?src-supplier=Newark, ComponentLink3Description=https://datasheet.octopart.com:443/M20-9990246-Harwin-datasheet-96624206.pdf?src-supplier=element14+APAC, ComponentLink3URL=https://datasheet.octopart.com:443/M20-9990246-Harwin-datasheet-96624206.pdf?src-supplier=element14+APAC, ComponentLink4Description=https://datasheet.octopart.com:443/M20-9990246-Harwin-datasheet-32864541.pdf?src-supplier=Farnell, ComponentLink4URL=https://datasheet.octopart.com:443/M20-9990246-Harwin-datasheet-32864541.pdf?src-supplier=Farnell, ComponentLink5Description=https://datasheet.octopart.com:443/M20-9990246-Harwin-datasheet-7538443.pdf?src-supplier=Farnell, ComponentLink5URL=https://datasheet.octopart.com:443/M20-9990246-Harwin-datasheet-7538443.pdf?src-supplier=Farnell, ComponentLink6Description=https://datasheet.octopart.com:443/M20-9990246-Harwin-datasheet-508868.pdf?src-supplier=Farnell, ComponentLink6URL=https://datasheet.octopart.com:443/M20-9990246-Harwin-datasheet-508868.pdf?src-supplier=Farnell, Connector Type="Male Pin", Contact Gender=Male, Contact Material=Brass, Contact Mating Length=6.096mm, Contact Plating=Tin, Country of Origin=Taiwan, Depth=2.54mm, Export Control Classification Number (ECCN) Code=EAR99, Gender=Male, Harmonized Tariff Schedule (HTS) Code=8536.69.40.40, Height=8.99mm, Housing Color=Black, Housing Material=Nylon, Introduction Date=2005-06-27, Lead Pitch=2.54mm, Length=5.08mm, Lifecycle Status=Production, Manufacturer Part Number=M20-9990246, Max Current Rating=3A, Mounting Technology="Through Hole", Number of Contacts=2, Number of Positions=2, Number of Rows=1, Orientation=Straight, Packaging=Bulk, Pins=2, Pitch=2.54mm, Pricing="1=0.1, 10=0.079, 100=0.0669, 500=0.0597, 1000=0.05684, 5000=0.05073, 10000=0.04831 (USD)", Radiation Hardening=No, REACH SVHC=Yes, RoHS=Compliant, Stock=177211, Supplier=DigiKey, Terminal Pitch=2.54mm, Termination=Solder
J2: "WR-PHD Straight Male, PCB Header, Through Hole, 1 Rows, 3 Contacts, 2.54mm Pitch", Color=Black, Contact Resistance=20mΩ, Current Rating=3A, Insulation Resistance=1GΩ, Manufacturer="Wurth Elektronik", Max Operating Temperature=105°C, Min Operating Temperature=-40°C, Operating Supply Voltage=250V, Category="Headers and Wire Housings", ComponentLink1Description=https://datasheet.octopart.com:443/61300311121-Wurth-Elektronik-datasheet-168684096.pdf?src-supplier=Wurth+Elektronik, ComponentLink1URL=https://datasheet.octopart.com:443/61300311121-Wurth-Elektronik-datasheet-168684096.pdf?src-supplier=Wurth+Elektronik, ComponentLink2Description=https://datasheet.octopart.com:443/61300311121-W%C3%BCrth-Elektronik-datasheet-44382959.pdf?src-supplier=Future+Electronics, ComponentLink2URL=https://datasheet.octopart.com:443/61300311121-W%C3%BCrth-Elektronik-datasheet-44382959.pdf?src-supplier=Future+Electronics, ComponentLink3Description=https://datasheet.octopart.com:443/61300311121-W%C3%BCrth-Elektronik-datasheet-149524047.pdf?src-supplier=Farnell, ComponentLink3URL=https://datasheet.octopart.com:443/61300311121-W%C3%BCrth-Elektronik-datasheet-149524047.pdf?src-supplier=Farnell, ComponentLink4Description=https://datasheet.octopart.com:443/61300311121-W%C3%BCrth-Elektronik-datasheet-21154836.pdf?src-supplier=element14+APAC, ComponentLink4URL=https://datasheet.octopart.com:443/61300311121-W%C3%BCrth-Elektronik-datasheet-21154836.pdf?src-supplier=element14+APAC, Connector Type="Male Pin", Contact Material=Gold, Contact Mating Length=5.9944mm, Contact Plating=Gold, Gender=Male, Height=8.94mm, Lead Free="Lead Free", Lead Pitch=2.54mm, Length=7.62mm, Manufacturer Part Number=61300311121, Mounting Technology="Through Hole", Number of Contacts=3, Number of Positions=3, Number of Rows=1, Orientation=Vertical, Packaging=Bulk, Pins=3, Pitch=2.54mm, Pricing="100=0.087, 500=0.086, 1000=0.084 (USD)", RoHS=Compliant, Stock=1092, Supplier=Newark, Supplier Part Number=61300311121, Termination=Solder, Voltage Rating=250V
J3: "CONN RCP USB2.0 TYP C 24P SMD RA", LCSC Part Number=C3197684, Manufacturer=Molex, Supplier Part Number=900-2171790001CT-ND, Category=Connectors, Manufacturer Part Number=217179-0001, Pricing="1=0.9, 10=0.745, 100=0.6212 (USD)", RoHS=No, Stock=7228, Supplier=Digikey
J4: library part B4B-XH-A, "Board Connector, 4 Contact(s), 1 Row(s), Male, Straight, Solder Terminal", Contact Resistance=20mΩ, Current Rating=3A, Insulation Resistance=1GΩ, Manufacturer=JST, Max Operating Temperature=85°C, Min Operating Temperature=-25°C, Category="Card Edge Connectors", ComponentLink1Description=https://datasheet.octopart.com:443/B4B-XH-A-JST-datasheet-157850277.pdf?src-supplier=IHS, ComponentLink1URL=https://datasheet.octopart.com:443/B4B-XH-A-JST-datasheet-157850277.pdf?src-supplier=IHS, ComponentLink2Description=https://datasheet.octopart.com:443/B4B-XH-A-JST-datasheet-10026044.pdf?src-supplier=TME, ComponentLink2URL=https://datasheet.octopart.com:443/B4B-XH-A-JST-datasheet-10026044.pdf?src-supplier=TME, Contact Gender=Male, Contact Material="Bronze, Tin", Export Control Classification Number (ECCN) Code=EAR99, Harmonized Tariff Schedule (HTS) Code=8536.69.40.40, Housing Material=Nylon, Introduction Date=1997-11-01, Lifecycle Status=Production, Manufacturer Part Number=B4B-XH-A, Number of Rows=1, Orientation=Straight, Pins=4, Pricing="1=0.14, 10=0.12, 100=0.1021, 500=0.09114, 1000=0.08679, 5000=0.07746, 10000=0.07376 (USD)", RoHS=Compliant, Stock=88606, Supplier=DigiKey, Supplier Part Number=455-B4B-XH-A-ND, Terminal Pitch=2.5mm
J5: "Board Connector, 2 Contact(s), 1 Row(s), Male, Straight, Solder Terminal", Contact Resistance=20mΩ, Current Rating=3A, Insulation Resistance=1GΩ, Manufacturer=JST, Max Operating Temperature=85°C, Min Operating Temperature=-25°C, Supplier Part Number=455-B2B-XH-A-ND, Category="Card Edge Connectors", ComponentLink1Description=https://datasheet.octopart.com:443/B2B-XH-A-JST-datasheet-157850277.pdf?src-supplier=IHS, ComponentLink1URL=https://datasheet.octopart.com:443/B2B-XH-A-JST-datasheet-157850277.pdf?src-supplier=IHS, ComponentLink2Description=https://datasheet.octopart.com:443/B2B-XH-A-JST-datasheet-10026044.pdf?src-supplier=TME, ComponentLink2URL=https://datasheet.octopart.com:443/B2B-XH-A-JST-datasheet-10026044.pdf?src-supplier=TME, Contact Gender=Male, Contact Material=Brass, Housing Material=Nylon, Lifecycle Status=Production, Manufacturer Part Number=B2B-XH-A, Number of Rows=1, Orientation=Straight, Pins=2, Pricing="1=0.1, 10=0.073, 100=0.0618, 500=0.05514, 1000=0.05251, 5000=0.04686, 10000=0.04463 (USD)", RoHS=Compliant, Stock=111560, Supplier=DigiKey, Terminal Pitch=2.5mm
J6: library part B5B-XH-A, "Board Connector, 5 Contact(s), 1 Row(s), Male, Straight, 0.098 inch Pitch, Solder Terminal", Contact Resistance=20mΩ, Current Rating=3A, Insulation Resistance=1GΩ, Manufacturer=JST, Max Operating Temperature=85°C, Min Operating Temperature=-25°C, Category="Card Edge Connectors", ComponentLink1Description=https://datasheet.octopart.com:443/B5B-XH-A-JST-datasheet-157850277.pdf?src-supplier=IHS, ComponentLink1URL=https://datasheet.octopart.com:443/B5B-XH-A-JST-datasheet-157850277.pdf?src-supplier=IHS, ComponentLink2Description=https://datasheet.octopart.com:443/B5B-XH-A-JST-datasheet-10026044.pdf?src-supplier=TME, ComponentLink2URL=https://datasheet.octopart.com:443/B5B-XH-A-JST-datasheet-10026044.pdf?src-supplier=TME, Contact Gender=Male, Contact Material="Bronze, Tin", Export Control Classification Number (ECCN) Code=EAR99, Harmonized Tariff Schedule (HTS) Code=8536.69.40.40, Housing Material=Nylon, Introduction Date=1997-11-01, Lifecycle Status=Production, Manufacturer Part Number=B5B-XH-A, Number of Rows=1, Orientation=Straight, Pins=5, Pricing="1=0.17, 10=0.144, 100=0.1225, 500=0.10932, 1000=0.10409, 5000=0.0929, 10000=0.08847 (USD)", RoHS=Compliant, Stock=112530, Supplier=DigiKey, Supplier Part Number=455-B5B-XH-A-ND, Terminal Pitch=2.5mm
Q1 Q2: "TRANS NPN 25V 1.5A SOT23-3", LCSC Part Number=C164886, Manufacturer=Comchip, Supplier Part Number=641-1790-1-ND, Category=Transistors, ComponentLink1Description=https://datasheet.ciiva.com:443/pdfs/VipMasterIC/IC/COMC/COMC-S-A0004994192/COMC-S-A0004994192-1.pdf?src-supplier=IHS+Markit, ComponentLink1URL=https://datasheet.ciiva.com:443/pdfs/VipMasterIC/IC/COMC/COMC-S-A0004994192/COMC-S-A0004994192-1.pdf?src-supplier=IHS+Markit, ComponentLink2Description="http://www.comchiptech.com/admin/files/product/SS8050-G RevA181526.pdf?src-supplier=Digikey", ComponentLink2URL="http://www.comchiptech.com/admin/files/product/SS8050-G RevA181526.pdf?src-supplier=Digikey", Manufacturer Part Number=SS8050-G, Pricing="1=0.29, 10=0.2, 100=0.0978, 500=0.08154, 1000=0.05666 (USD)", Reach SVHC Compliant=Yes, RoHS=Yes, RoHS Compliant=Yes, Stock=108568, Supplier=Digikey